# Altium PCB SourceFollower_TSFP-4-1_Modular.PcbDoc
Units mm, origin at the board's own origin, x right, y up, seen from the top; angles counter-clockwise.
Board outline 40 x 8 mm, 2 copper layers (Top Layer, Bottom Layer); 21 components, 10 nets, 49 pads, 4 vias.
Unrouted connection lines stored in the file: 29.
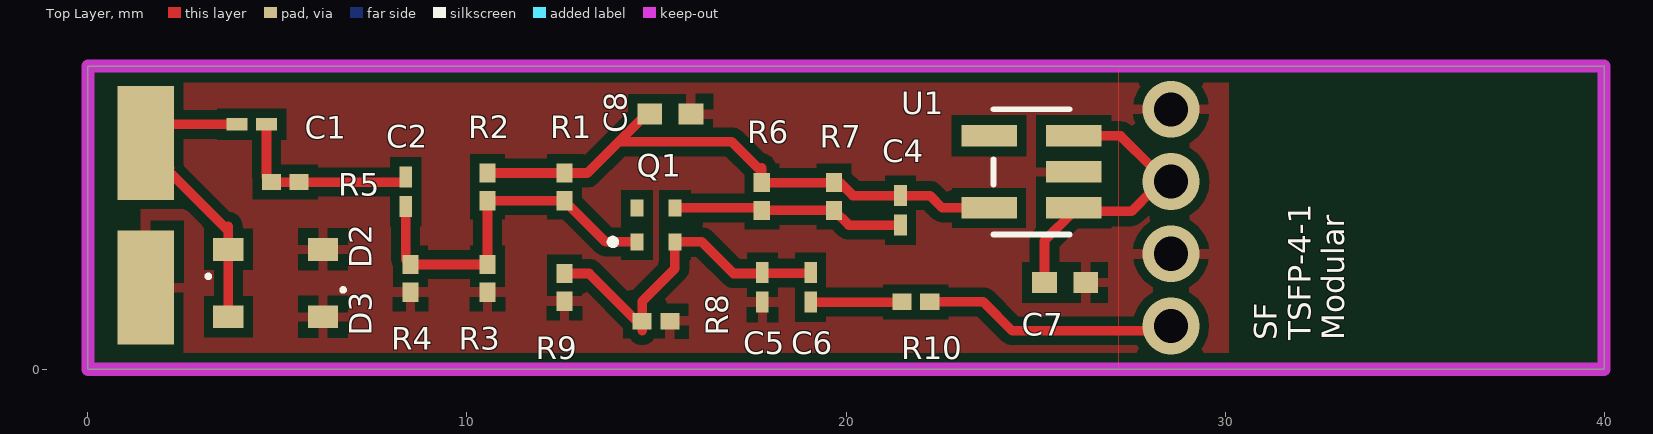
[diagram p0: Top Layer view]
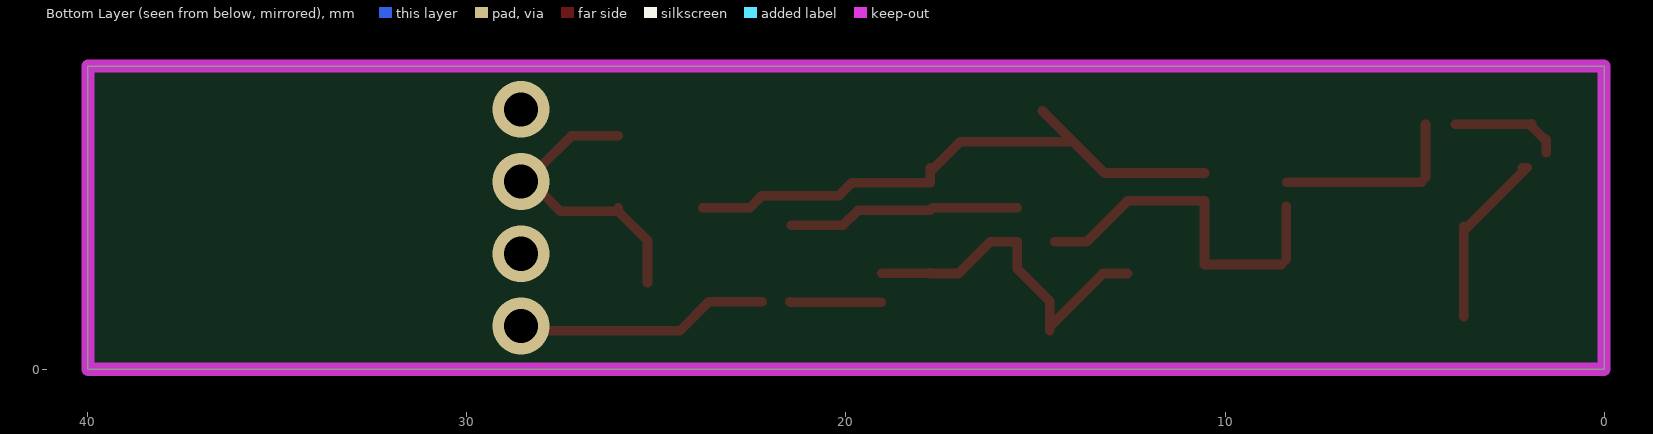
[diagram p1: Bottom Layer view, seen from below]

## Layer stack, top to bottom
Top Solder: solder mask 0.0102, Solder Resist, Dk 3.5
Top Layer: signal copper 0.0356
Dielectric 1: dielectric 0.32, FR-4, Dk 4.8
Bottom Layer: signal copper 0.0356
Bottom Solder: solder mask 0.0102, Solder Resist, Dk 3.5

## Board outline
0,0 40,0 40,8 0,8

## Design rules (kind name [scope] priority, off if disabled: settings)
Clearance [All] p1: gap=0.254 ignorepadtopadclearanceinfootprint=FALSE except(0: Arc-Hole Track-Hole SMDPad-Hole THPad-Hole Via-Hole Fill-Hole Poly-Hole Region-Hole Text-Hole)
PolygonConnect [All] p1: connectstyle=Relief reliefconductorwidth=0.254 reliefentries=4 polygonreliefangle="90 Angle" airgapwidth=0.254
RoomDefinition SourceFollower_TSFP-4-1_Modular [InComponentClass('SourceFollower_TSFP-4-1_Modular')] p1: confinementstyle=ConfineIn formatcopy=TRUE lockcomponents=FALSE outline 0,0 40,0 40,8 0,8
RoutingVias [All] p1: holewidth=0.711 width=1.27 viastyle="Through Hole" minholewidth=0.711 minwidth=1.27 maxholewidth=0.711 maxwidth=1.27
SolderMaskExpansion [All] p1: expansion=0.102
Width [All] p1: maxlimit=0.254 minlimit=0.254 preferedwidth=0.254
30 further rules are at their usual default settings.

## Components (designator, comment, footprint, x,y, rotation, side; value= is the part's Value field where it differs from the comment)
C1 "Part Number: C0201C270J3GACTU" C0201 4.318,6.462 r0 top value=Value
C2 "Part Number: C0201C270J3GACTU" C0201 8.382,4.684 r90 top value=Value
C4 "Part Number: C0201C270J3GACTU" C0201 21.438,4.191 r90 top value=Value
C5 "Part Number: C0201C270J3GACTU" C0201 17.795,2.159 r90 top value=Value
C6 "Part Number: C0201C270J3GACTU" C0201 19.065,2.159 r90 top value=Value
C7 "Part Number: CC0402KRX7R6BB104" YAG_CC0402 25.781,2.286 r180 top value=Value
C8 "Part Number: CC0402KRX7R6BB104" YAG_CC0402 15.367,6.731 r180 top value=Value
D2 "BAT15-03W" INF-SOD323_V 4.953,3.16 r90 top
D3 "BAT15-03W" INF-SOD323_V 4.953,1.382 r270 top
Q1 "BFP720F" INF-TSFP-4-1_V 14.986,3.81 r90 top
R1 "Part Number: RC0201FR-0718KL" RES_RC0201_P6XP3 12.573,4.811 r90 top value=Value
R2 "Part Number: RC0201FR-0718KL" RES_RC0201_P6XP3 10.541,4.811 r90 top value=Value
R3 "Part Number: RC0201FR-0718KL" RES_RC0201_P6XP3 10.541,2.398 r90 top value=Value
R4 "Part Number: RC0201FR-0718KL" RES_RC0201_P6XP3 8.509,2.398 r90 top value=Value
R5 "Part Number: RC0201FR-0718KL" RES_RC0201_P6XP3 5.207,4.938 r180 top value=Value
R6 "Part Number: RC0201FR-0718KL" RES_RC0201_P6XP3 17.78,4.557 r90 top value=Value
R7 "Part Number: RC0201FR-0718KL" RES_RC0201_P6XP3 19.685,4.557 r90 top value=Value
R8 "Part Number: RC0201FR-0718KL" RES_RC0201_P6XP3 14.986,1.27 r180 top value=Value
R9 "Part Number: RC0201FR-0718KL" RES_RC0201_P6XP3 12.573,2.159 r270 top value=Value
R10 "Part Number: RC0201FR-0718KL" RES_RC0201_P6XP3 21.844,1.778 r0 top value=Value
U1 "Part Number: LP5907MFX-3.3/NOPB" DBV5 24.892,5.207 r180 top value=Value

## Footprints (in the part's own frame and the unit in brackets; to place one, negate y for a bottom-side part, rotate by r counter-clockwise, add the part's x,y. Pads: shape width x height; smd on the part's side, far side on the other; paste and mask are expansions set on the pad)
C0201 [mil]
  rect 21.78x13 smd paste+0 mask+0: 1(-15.39,0) 2(15.39,0)
  body extent 0,0 10,10, height 10
DBV5 [mil]
  rect 57.56x22.36 smd paste+0 mask+0: 1(-44,37.4) 2(-44,0) 3(-44,-37.4) 4(44,-37.4) 5(44,37.4)
  silkscreen extent -40,-65 40,65, body extent 0,0 10,10, height 10
INF-SOD323_V [mm] "SOD, 2-Leads, Body 1.7x1.25 mm"
  rect 0.6x0.8 smd: 1(0,1.25) 2(0,-1.25)
  silkscreen extent -0.76,1.73 -0.66,1.83, body extent -0.63,-0.85 0.63,0.85, height 1.1
INF-TSFP-4-1_V [mm] "SOP-Flat, Body 0.8x1.4 mm, Pitch 1 mm"
  rect 0.45x0.35 smd: 1(-0.45,0.5) 2(-0.45,-0.5) 3(0.45,-0.5) 4(0.45,0.5)
  silkscreen extent -0.49,1.1 -0.41,1.17, body extent -0.4,-0.7 0.4,0.7, height 0.59
RES_RC0201_P6XP3 [mm]
  rect 0.503x0.43 smd paste+0 mask+0: 1(-0.366,0) 2(0.366,0)
  body extent 0,0 0.25,0.25, height 0.25
YAG_CC0402 [mil]
  rect 25.78x22 smd paste+0 mask+0: 1(-21.39,0) 2(21.39,0)
  body extent 0,0 10,10, height 10

## Part data
C1 C2 C4 C5 C6: library part C0201C270J3GACTU, "No Description Available", Built_By=EMA_UL_Team, Copyright="Copyright (C) 2018 Accelerated Designs. All rights reserved", Manufacturer_Part_Number=C0201C270J3GACTU, RefDes=RefDes, Type=DEV, Vendor=Kemet
C7 C8: library part CC0402KRX7R6BB10, "No Description Available", Manufacturer_Part_Number=CC0402KRX7R6BB104, Built_By=EMA_UL_Team, Copyright="Copyright (C) 2018 Accelerated Designs. All rights reserved", RefDes=RefDes, Type=DEV, Vendor=Yageo
D2 D3: "Single Silicon Schottky Diode, 110 mA IF Max, SOD32, Green", Manufacturer=Infineon, Supplier Part Number 1=N/A, ComponentLink1Description="Manufacturer URL", ComponentLink1URL=http://www.infineon.com/, ComponentLink2Description=Datasheet, ComponentLink2URL=http://www.infineon.com/dgdl/bat15series.pdf?folderId=db3a304314dca3890114ff6812070b44&fileId=db3a304314dca3890114ff6b74ca0b48&location=en.Products.RF.RF_Mixer___Detector_Schottky_Diodes.DATASHEET.bat15series.pdf, ComponentLink3Description="Package Specification", ComponentLink3URL=http://www.infineon.com/dgdl/SOD323-Package_Overview.pdf?folderId=db3a30431936bc4b011952aab84f3bbe&fileId=db3a30431936bc4b011952beed653be3, Configuration=Single, CT (typ)="0.26 pF", DatasheetVersion=Jun-2011, Green=yes, Group="RF Mixer", IF (max)="110 mA", Mounting Technology="Surface Mount", PackageDescription="2-Pin Small Outline Diode Package, 1.25 x 1.7 mm Body", PackageReference=SOD323, PartNumber=BAT15-03W, Supplier 1=Mouser, VF (typ)="0.23 V", VR (max)="4 V"
Q1: "SiGe:C Heterojunction Wideband RF Bipolar Transistor, 4 V VCEO, 20 mA IC, 26 dB Gmax, TSFP-4-1, Green", Manufacturer=Infineon, ComponentLink1Description="Manufacturer URL", ComponentLink1URL=http://www.infineon.com/, ComponentLink2Description=Datasheet, ComponentLink2URL=http://www.infineon.com/dgdl/bfp720f.pdf?folderId=db3a30431400ef68011425b291f205c5&fileId=db3a30431ddc9372011e2673bdbf4727&location=en.Products.RF.RF_Transistors_.Ultra_Low_Noise_SiGe_C_Transistors_for_use_up_to_12_GHz.DATASHEET.bfp720f.pdf, ComponentLink3Description="Package Specification", ComponentLink3URL=http://www.infineon.com/dgdl/TSFP-4-1%2C-2-Package_Overview.pdf?folderId=db3a30431936bc4b011953b7d203683d&fileId=db3a30431936bc4b011953c249663734, DatasheetVersion="Rev. 1.0", Gmax (typ)="26 dB", Green=yes, Group="Ultra low noise SiGe", Halogen-free=yes, IC (max)="20 mA", Mounting Technology="Surface Mount", NFmin (typ)="0.5 dB", PackageDescription="4-Pin Thin Small Flat Package, 0.8 x 1.4 mm Body, 0.5 mm Pitch", PackageReference=TSFP-4-1, PartNumber=BFP720F, Ptot (max)=80mW, VCEO (max)="4 V"
R1 R2 R3 R4 R5 R6 R7 R8 R9 R10: library part RC0201FR-0718KL, "No Description Available", Built_By=EMA_Anthony, Copyright="Copyright (C) 2018 Accelerated Designs. All rights reserved", Manufacturer_Part_Number=RC0201FR-0718KL, RefDes=RefDes, Type=DEV, Vendor=Yageo
U1: library part LP5907MFX-3.3/NO, "No Description Available", Manufacturer_Part_Number=LP5907MFX-3.3/NOPB, Built_By=EMA_UL_Team, Copyright="Copyright (C) 2018 Accelerated Designs. All rights reserved", RefDes=RefDes, Type=DEV, Vendor="Texas Instruments"

## Free pads (board coordinates)
  rect 1.5x3 smd: 4(1.524,2.159) 4(1.524,5.969)

## Via types
v1: diameter 1.5, hole 0.9, Top Layer to Bottom Layer, 4 vias

## Nets (pads, with @x,y where several pads share a name; then routed paths per layer and width w, separated by ;. In a path a pad name is that pad's centre, name@x,y a point inside that pad or via, vN(x,y) a via of type N, cw(c..) or ccw(c..) an arc to the next point about the centre after c; other vN are vias at no path point)
GND: C2.1 C5.1 C7.1 C8.1 D2.2 D3.1 pad.4@1.524,2.159 R3.1 R4.1 R8.1 R9.2 U1.2
  other v1: 28.575,3.048 28.575,6.858
NetC1_2: C1.2 R5.2
NetC2_2: C2.2 Q1.1 R1.1 R2.1 R3.2 R4.2 R5.1
NetC4_1: C4.1 Q1.3 R6.1 R7.1
NetC5_2: C5.2 C6.2 Q1.2 R8.2 R9.1
NetC6_1: C6.1 R10.1
"RF In": C1.1 D2.1 D3.2 pad.4@1.524,5.969
"RF Out": R10.2
  other v1: 28.575,1.143
VCC: C7.2 U1.1 U1.3
  other v1: 28.575,4.953
VOUT: C4.2 C8.2 R1.2 R2.2 R6.2 R7.2 U1.5
pads on no net: Q1.4 U1.4
copper on no net: | length 69.4
  Top Layer w0.254: 1.524,5.715 1.524,6.017 1.92,6.413 1.92,6.462 ; 1.524,5.969 1.524,6.066 ; 1.905,6.477 1.92,6.462 ; 2.159,5.319 2.032,5.319 3.703,3.648 3.703,3.16 ; 3.703,1.382 3.703,3.16 ; 3.703,3.775 3.703,3.16 ; 3.927,6.462 2.794,6.462 1.92,6.462 ; 4.709,5.07 4.709,6.462 ; 4.811,4.938 8.372,4.938 ; 8.382,2.891 8.382,4.293 ; 8.509,2.764 10.541,2.764 10.541,4.445 12.573,4.445 12.588,4.43 13.658,3.36 14.486,3.36 ; 10.541,5.177 12.573,5.177 13.178,5.177 14.824,6.823 ; 12.573,2.525 13.223,2.525 14.62,1.128 14.62,1.016 ; 14.001,6 16.987,6 17.78,5.207 ; 14.62,1.072 14.62,1.793 15.486,2.659 15.486,3.36 16.198,3.36 17.033,2.525 17.77,2.525 17.795,2.55 ; 15.486,4.26 17.711,4.26 ; 17.78,4.191 19.685,4.191 20.076,3.8 21.438,3.8 ; 17.78,5.319 17.78,4.923 19.685,4.923 19.842,4.923 20.183,4.582 21.438,4.582 22.215,4.582 22.54,4.257 23.774,4.257 ; 17.783,2.537 19.053,2.537 ; 19.065,1.768 21.468,1.768 21.478,1.778 ; 22.21,1.778 23.622,1.778 24.384,1.016 27.94,1.016 ; 25.238,2.286 25.238,3.394 26.01,4.166 ; 26.01,4.257 26.01,4.166 ; 26.01,6.157 27.244,6.157 28.067,5.334 ; 28.067,4.699 27.534,4.166 26.01,4.166

## Polygon pours and split planes (outlines as drawn)
GND on Top Layer "Top Layer-GND 1" (solid, pour order 30): 30.099,0 30.099,8.001 1.397,8.001 1.397,0
no net on Top Layer "Top Layer-No Net" (solid, pour order 28): 30.099,0.127
GND on Top Layer "Top Layer-GND" (solid, shelved, pour order 20): 27.178,8.001 27.178,0 0,0 0,8.001
no net on Top Layer "Top Layer-No Net 2" (solid, pour order 14): 29.718,0
no net on Top Layer "Top Layer-No Net 3" (solid, pour order 8): 0,8.128

## Keep-outs
Keep-Out Layer:
  the board outline again, w0.35

## Silkscreen, mask and mechanical layers (free items; w line width, h text height)
Top Overlay:
  text "SF" at 31.369,0.762 h0.6 r90
  text "TSFP-4-1" at 32.258,0.762 h0.6 r90
  text "Modular" at 33.147,0.762 h0.6 r90

## Text inside footprints (layer, text, board x,y; h text height)
U1: Mechanical 13 "*" at 25.832,4.781 h1.27 r180